# Altium PCB 5V-REG.PcbDoc
Units mil, origin at the board's own origin, x right, y up, seen from the top; angles counter-clockwise.
Board outline 2445 x 655 mil, 2 copper layers (Top Layer, Bottom Layer); 8 components, 4 nets, 17 pads, 0 vias.
Unrouted connection lines stored in the file: 1.
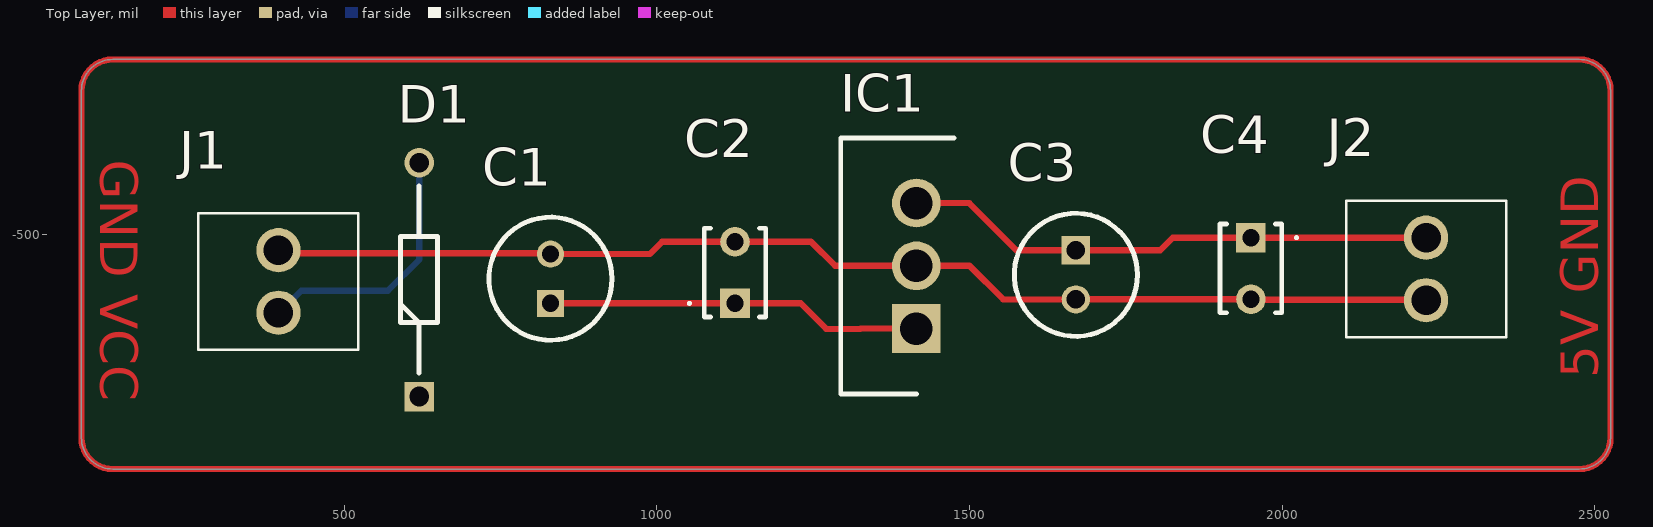
[diagram p0: Top Layer view]
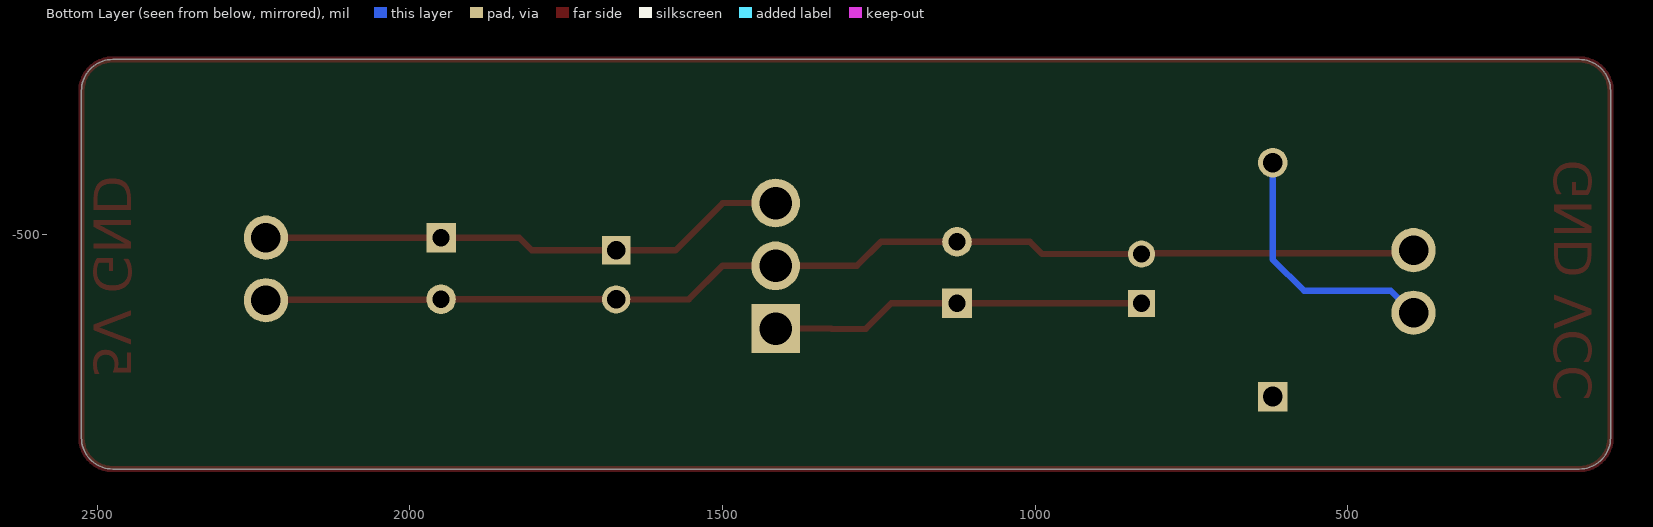
[diagram p1: Bottom Layer view, seen from below]
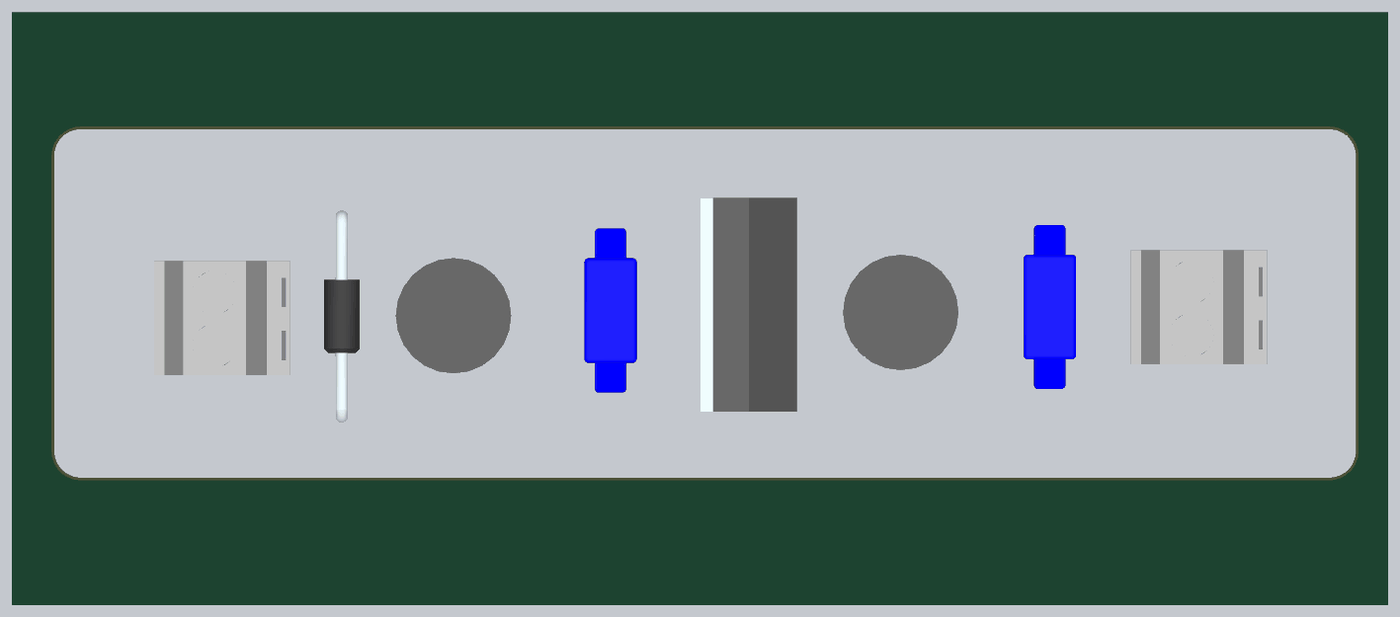
[diagram p2: 3D render of the assembled board from above, using the file's embedded part models]

## Layer stack, top to bottom
Top Solder: solder mask 0.4, Solder Resist, Dk 3.5
Top Layer: signal copper 1.4
Dielectric 1: dielectric 12.6, FR-4, Dk 4.8
Bottom Layer: signal copper 1.4
Bottom Solder: solder mask 0.4, Solder Resist, Dk 3.5

## Board outline
80,-825 80,-270 cw(c130,-270) 130,-220 2475,-220 cw(c2475,-270) 2525,-270 2525,-825 cw(c2475,-825) 2475,-875 130,-875 cw(c130,-825)

## Design rules (kind name [scope] priority, off if disabled: settings)
Clearance [All] p1: gap=10 ignorepadtopadclearanceinfootprint=FALSE
PolygonConnect [All] p1: connectstyle=Relief reliefconductorwidth=10 reliefentries=4 polygonreliefangle="90 Angle" airgapwidth=10
RoutingVias [All] p1: holewidth=28 width=50 viastyle="Through Hole" minholewidth=28 minwidth=50 maxholewidth=28 maxwidth=50
SolderMaskExpansion [All] p1: expansion=4 istentingtop=FALSE
SupplyNets "Schematic Supply Nets_2" [InNet('GND')] p1: voltage=0.000
SupplyNets "Schematic Supply Nets_1" [InNet('VCC')] p2: voltage=0.000
SupplyNets "Schematic Supply Nets" [InNet('5V')] p3: voltage=0.000
Width [All] p1: maxlimit=10 minlimit=10 preferedwidth=10
30 further rules are at their usual default settings.

## Components (designator, comment, footprint, x,y, rotation, side; value= is the part's Value field where it differs from the comment)
C1 "0.22 uF" CAPPRD200W52D500H1250 830,-610 r90 top
C2 "0.1 uF" RDER71E104K0P1H03B 1125,-610 r90 top
C3 "10 uF" CAPPRD200W55D500H1250 1670,-525 r270 top
C4 "0.1 uF" RDER71E104K0P1H03B 1950,-505 r270 top
D1 "SD103A-TR" DIOAD950W60L350D150 620,-759.02 r90 top
IC1 "L7805CV" TO255P460X1020X2008-3P 1415,-650.39 r90 top
J1 "1546215-2" 15462152 395,-525 r270 top
J2 "1546215-2" 15462152 2230,-505 r270 top

## Footprints (in the part's own frame and the unit in brackets; to place one, negate y for a bottom-side part, rotate by r counter-clockwise, add the part's x,y. Pads: shape width x height; smd on the part's side, far side on the other; paste and mask are expansions set on the pad)
15462152 [mm]
  round 1.8 hole 1.2: 1(0,0) 2(2.54,0)
  silkscreen extent -1.5,-3.25 4.04,3.25, body extent -1.46,-3.25 4,3.25, height 9.91
CAPPRD200W52D500H1250 [mm]
  rect 1.1x1.1 hole 0.7: 1(0,0)
  round 1.1 hole 0.7: 2(2,0)
  silkscreen extent -1.5,-2.5 3.5,2.5, body extent -1.74,-2.75 3.75,2.75, height 12.5
CAPPRD200W55D500H1250 [mm]
  rect 1.15x1.15 hole 0.75: 1(0,0)
  round 1.15 hole 0.75: 2(2,0)
  silkscreen extent -1.5,-2.5 3.5,2.5, body extent -1.74,-2.75 3.75,2.75, height 12.5
DIOAD950W60L350D150 [mm]
  rect 1.2x1.2 hole 0.8: 1(0,0)
  round 1.2 hole 0.8: 2(9.5,0)
  silkscreen extent 0.95,-0.75 8.55,0.75, body extent -0.3,-0.84 9.8,0.84, height 1.7
RDER71E104K0P1H03B [mm]
  rect 1.2x1.2 hole 0.7: 1(0,0)
  round 1.2 hole 0.7: 2(2.5,0)
  silkscreen extent -0.55,-1.25 3.05,1.9, body extent -2.67,-1.25 5.17,1.25, height 6.75
TO255P460X1020X2008-3P [mm]
  rect 1.98x1.98 hole 1.32: 1(0,0)
  round 1.98 hole 1.32: 2(2.55,0) 3(5.1,0)
  silkscreen extent -2.65,-1.53 7.75,3.07, body extent -2.55,-1.53 7.65,3.07, height 20.08

## Part data
C1: library part 860010772002, "Capacitor Polarised", Manufacturer_Name="Wurth Elektronik", Mouser Part Number=710-860010772002, Datasheet Link=https://componentsearchengine.com/Datasheets/1/860010772002.pdf, Height=12.5mm, Manufacturer_Part_Number=860010772002, Mouser Price/Stock=https://www.mouser.co.uk/ProductDetail/Wurth-Elektronik/860010772002?qs=0KOYDY2FL2%2FXueoM4QQtRg%3D%3D
C2 C4: library part RDER71E104K0P1H03B, "Capacitor", Manufacturer_Name="Murata Electronics", Mouser Part Number=81-RDER71E104K0P1H3B, Arrow Part Number=RDER71E104K0P1H03B, Arrow Price/Stock=https://www.arrow.com/en/products/rder71e104k0p1h03b/murata-manufacturing?utm_currency=USD&region=nac, Datasheet Link=https://search.murata.co.jp/Ceramy/image/img/A01X/G101/ENG/RDE_X7R_X7S_25V-100V_E.pdf, Height=2.5mm, Manufacturer_Part_Number=RDER71E104K0P1H03B, Mouser Price/Stock=https://www.mouser.co.uk/ProductDetail/Murata-Electronics/RDER71E104K0P1H03B?qs=hNud%2FORuBR1RYUkyJwpo2Q%3D%3D
C3: library part EEU-FR1H100, "Capacitor Polarised", Manufacturer_Name=Panasonic, Mouser Part Number=667-EEU-FR1H100, Datasheet Link=http://industrial.panasonic.com/cdbs/www-data/pdf/RDF0000/ABA0000C1259.pdf, Height=12.5mm, Manufacturer_Part_Number=EEU-FR1H100, Mouser Price/Stock=https://www.mouser.co.uk/ProductDetail/Panasonic/EEU-FR1H100?qs=tfZGHB2PWd1NAbdNSgjToQ%3D%3D
D1: "Schottky Diode", Manufacturer_Name=Vishay, Mouser Part Number=625-SD103A, Arrow Part Number=SD103A-TR, Arrow Price/Stock=https://www.arrow.com/en/products/sd103a-tr/vishay?utm_currency=USD&region=nac, Datasheet Link=https://componentsearchengine.com/Datasheets/5/SD103A-TR.pdf, Manufacturer_Part_Number=SD103A-TR, Mouser Price/Stock=https://www.mouser.co.uk/ProductDetail/Vishay-Semiconductors/SD103A-TR?qs=RwahMLkpD2urFD%2FzZdGOBw%3D%3D
IC1: "Integrated Circuit", Manufacturer_Name=STMicroelectronics, Mouser Part Number=511-L7805CV, Arrow Part Number=L7805CV, Arrow Price/Stock=https://www.arrow.com/en/products/l7805cv/stmicroelectronics?utm_currency=USD&region=europe, Datasheet Link=http://www.st.com/web/en/resource/technical/document/datasheet/CD00000444.pdf, Height=4.6mm, Manufacturer_Part_Number=L7805CV, Mouser Price/Stock=https://www.mouser.co.uk/ProductDetail/STMicroelectronics/L7805CV?qs=9NrABl3fj%2FqplZAHiYUxWg%3D%3D
J1 J2: "Connector", Manufacturer_Name="TE Connectivity", Mouser Part Number=571-1546215-2, Arrow Part Number=1546215-2, Arrow Price/Stock=https://www.arrow.com/en/products/1546215-2/te-connectivity?utm_currency=USD&region=nac, Datasheet Link=https://www.te.com/commerce/DocumentDelivery/DDEController?Action=srchrtrv&DocNm=1-1773458-1_EURO_STYLE_QRG&DocType=Data%20Sheet&DocLang=English&PartCntxt=1546215-2&DocFormat=pdf, Height=10.3mm, Manufacturer_Part_Number=1546215-2, Mouser Price/Stock=https://www.mouser.co.uk/ProductDetail/TE-Connectivity/1546215-2?qs=Lxq28tKK6BPmJFoAOY7Ljw%3D%3D

## Nets (pads, with @x,y where several pads share a name; then routed paths per layer and width w, separated by ;. In a path a pad name is that pad's centre, name@x,y a point inside that pad or via, vN(x,y) a via of type N, cw(c..) or ccw(c..) an arc to the next point about the centre after c; other vN are vias at no path point)
5V: C3.1 C4.1 IC1.3 J2.1 | length 854.5
  Top Layer w10: IC1.3 1499.61,-449.61 1575,-525 C3.1 1805,-525 1825,-505 C4.1 J2.1
GND: C1.2 C2.2 C3.2 C4.2 IC1.2 J1.1 J2.2 | length 1886.3
  Top Layer w10: J1.1 400,-530 825,-530 C1.2@830,-535 ; C1.2 988.74,-531.26 1008.43,-511.57 C2.2 1246.57,-511.57 1285,-550 IC1.2 1500,-550 1553.74,-603.74 C3.2 1670.16,-603.58 1949.84,-603.58 C4.2 1950.79,-604.21 2229.21,-604.21 J2.2
NetC1_1: C1.1 C2.1 D1.1 IC1.1 | length 602.1
  Top Layer w10: C1.1 C2.1 1230,-610 1270.86,-650.86 1325.71,-650.86 1326.17,-650.39 IC1.1
VCC: D1.2 J1.2 | length 415.2
  Bottom Layer w10: J1.2 396.32,-625 431.32,-590 570,-590 620,-540 D1.2
copper on no net: | length 6114.2
  Top Layer w10: 80,-825 ccw(c130,-825) 130,-875 2475,-875 ccw(c2475,-825) 2525,-825 2525,-270 ccw(c2475,-270) 2475,-220 130,-220 ccw(c130,-270) 80,-270 80,-545 80,-825

## Other copper
Top Layer:
  text "GND VCC" at 110,-380 h60 r270
  text "5V GND" at 2505,-730 h60 r90

## Silkscreen, mask and mechanical layers (free items; w line width, h text height)
CUTOUT:
  lines w10: 0,-1115 0,0 2585,0 2585,-1115 0,-1115